# EAGLE board facedancer10 (EAGLE 6.1)
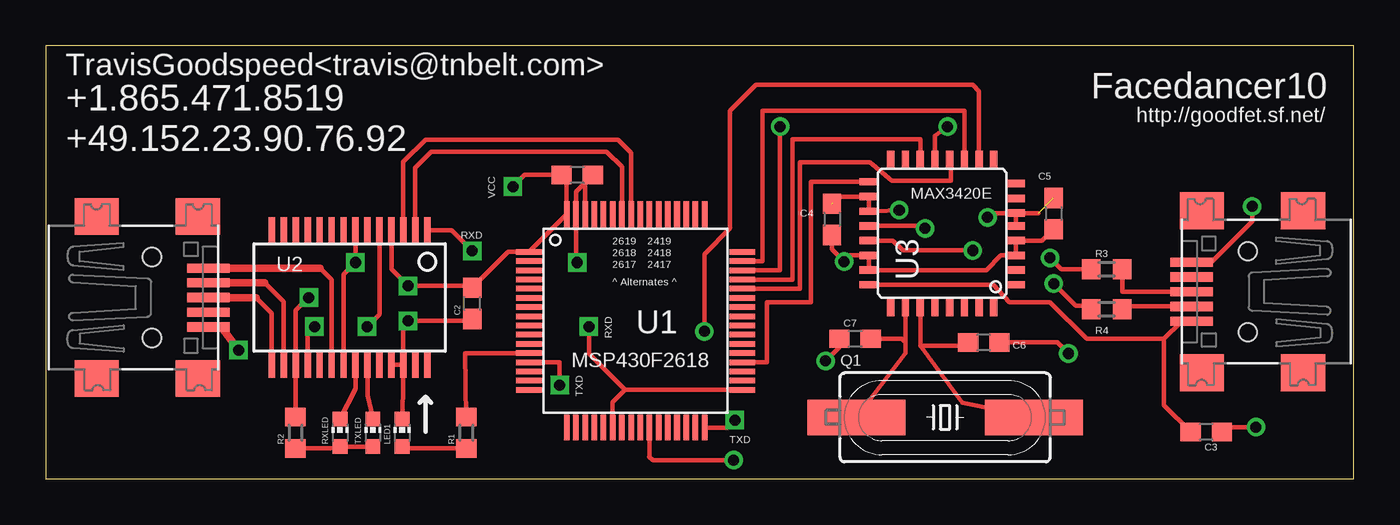
[diagram p0: board, top side]
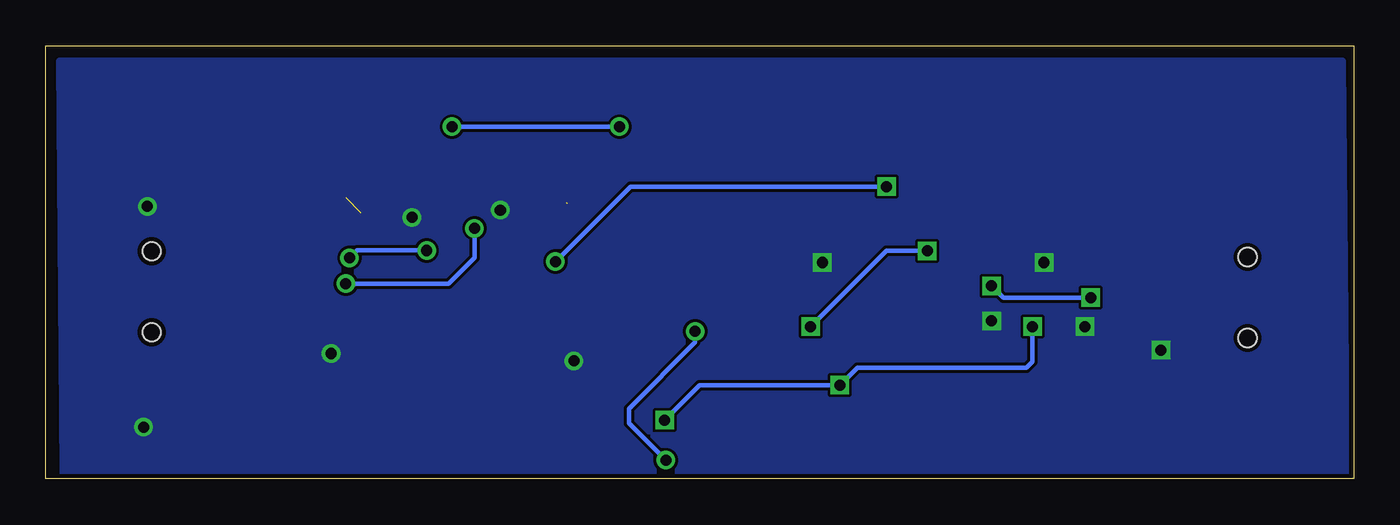
[diagram p1: board, bottom side, seen from below]

Size 71.11 x 23.52 mm. Coordinates in mm from the lower left corner, seen from the top.
Outline: 0,0 71.11,0 71.11,23.52 0,23.52 0,0
Copper layers (1*16): Top 0.035mm / dielectric 1.5mm / Bottom 0.035mm
Design rules: minimum track width 10mil, minimum drill 8mil, track to track 6mil, track to pad 6mil, pad to pad 6mil, via to via 6mil, smd to smd 6mil, copper to edge 10mil, drill to drill 8mil, minimum pad ring 10mil, minimum via ring 8mil, stop-mask expansion 4mil, vias tented up to drill 0mil, thermal gap 10mil

## Footprints (pad centres in the part's own frame; a part is rotated, then mirrored left to right if it is on the bottom)
C0603 = smd 1.1 x 1: 1 -0.85,0; 2 0.85,0
USB-MINIB = smd 0.5 x 2.308: D+ 0,4.064; D- -0.8,4.064; GND 1.6,4.064; ID 0.8,4.064; VBUS -1.6,4.064 | smd 2 x 2.4: GND1 -4.4,-2; GND2 -4.4,3.5; GND3 4.4,3.5; GND4 4.4,-2 | hole 1: -2.2,1; 2.2,1
CHIP-LED0603 = smd 0.8 x 0.8: A 0,-0.75; C 0,0.75
HC49UP = smd 5.334 x 1.93: 1 -4.826,0; 2 4.826,0
R0603 = smd 1 x 1.1: 1 -0.85,0; 2 0.85,0
PM/PAG64 = smd 1.4 x 0.3: 1 -5.8,3.75; 2 -5.8,3.25; 3 -5.8,2.75; 4 -5.8,2.25; 5 -5.8,1.75; 6 -5.8,1.25; 7 -5.8,0.75; 8 -5.8,0.25; 9 -5.8,-0.25; 10 -5.8,-0.75; 11 -5.8,-1.25; 12 -5.8,-1.75; 13 -5.8,-2.25; 14 -5.8,-2.75; 15 -5.8,-3.25; 16 -5.8,-3.75; 33 5.8,-3.75; 34 5.8,-3.25; 35 5.8,-2.75; 36 5.8,-2.25; 37 5.8,-1.75; 38 5.8,-1.25; 39 5.8,-0.75; 40 5.8,-0.25; 41 5.8,0.25; 42 5.8,0.75; 43 5.8,1.25; 44 5.8,1.75; 45 5.8,2.25; 46 5.8,2.75; 47 5.8,3.25; 48 5.8,3.75 | smd 0.3 x 1.4: 17 -3.75,-5.8; 18 -3.25,-5.8; 19 -2.75,-5.8; 20 -2.25,-5.8; 21 -1.75,-5.8; 22 -1.25,-5.8; 23 -0.75,-5.8; 24 -0.25,-5.8; 25 0.25,-5.8; 26 0.75,-5.8; 27 1.25,-5.8; 28 1.75,-5.8; 29 2.25,-5.8; 30 2.75,-5.8; 31 3.25,-5.8; 32 3.75,-5.8; 49 3.75,5.8; 50 3.25,5.8; 51 2.75,5.8; 52 2.25,5.8; 53 1.75,5.8; 54 1.25,5.8; 55 0.75,5.8; 56 0.25,5.8; 57 -0.25,5.8; 58 -0.75,5.8; 59 -1.25,5.8; 60 -1.75,5.8; 61 -2.25,5.8; 62 -2.75,5.8; 63 -3.25,5.8; 64 -3.75,5.8
SSOP28DB = smd 0.348 x 1.397: 1 -4.225,-3.656; 2 -3.575,-3.656; 3 -2.925,-3.656; 4 -2.275,-3.656; 5 -1.625,-3.656; 6 -0.975,-3.656; 7 -0.325,-3.656; 8 0.325,-3.656; 9 0.975,-3.656; 10 1.625,-3.656; 11 2.275,-3.656; 12 2.925,-3.656; 13 3.575,-3.656; 14 4.225,-3.656; 15 4.225,3.656; 16 3.575,3.656; 17 2.925,3.656; 18 2.275,3.656; 19 1.625,3.656; 20 0.975,3.656; 21 0.325,3.656; 22 -0.325,3.656; 23 -0.975,3.656; 24 -1.625,3.656; 25 -2.275,3.656; 26 -2.925,3.656; 27 -3.575,3.656; 28 -4.225,3.656
LQFP32 = smd 0.4 x 1: P1 -2.8,-4; P2 -2,-4; P3 -1.2,-4; P4 -0.4,-4; P5 0.4,-4; P6 1.1,-4; P7 1.9,-4; P8 2.7,-4; P17 2.8,4; P18 2,4; P19 1.2,4; P20 0.4,4; P21 -0.4,4; P22 -1.2,4; P23 -2,4; P24 -2.8,4 | smd 1 x 0.4: P9 4,-2.8; P10 4,-2; P11 4,-1.2; P12 4,-0.4; P13 4,0.4; P14 4,1.2; P15 4,2; P16 4,2.8; P25 -4,2.8; P26 -4,2; P27 -4,1.2; P28 -4,0.4; P29 -4,-0.4; P30 -4,-1.2; P31 -4,-2; P32 -4,-2.8

## Placement (x,y rotation side)
C1  0.1µF  [C0603]  28.89,16.51 180 top
C2  0.1µF  [C0603]  23.18,9.53 90 top
C3  1.0uF  [C0603]  63.1,2.54 180 top
C4  1.0uF  [C0603]  42.74,14.1 270 top
C5  0.1µF  [C0603]  54.79,14.4 270 top
C6  18pF  [C0603]  51,7.4 180 top
C7  18pF  [C0603]  44,7.6 0 top
CN1  HOST  [USB-MINIB]  4.76,9.84 270 top
CN2  VICTIM  [USB-MINIB]  66.36,10.16 90 top
LED1  [CHIP-LED0603]  19.37,2.49 0 top
Q1  12MHz  [HC49UP]  48.9,3.33 0 top
R1  330  [R0603]  22.86,2.49 90 top
R2  330  [R0603]  13.57,2.49 90 top
R3  33  [R0603]  57.68,11.38 0 top
R4  33  [R0603]  57.68,9.21 0 top
RXLED  [CHIP-LED0603]  15.99,2.49 0 top
TXLED  [CHIP-LED0603]  17.78,2.49 0 top
U1  F261X---PM64  [PM/PAG64]  32.07,8.57 0 top
U2  FT232RL-BASICSSOP  [SSOP28DB]  16.51,9.84 180 top
U3  MAX3420ELQFP32  [LQFP32]  48.74,13.34 90 top

## Library data of the parts
C1-C7 R1-R4 = rcl
CN1 CN2 = adafruit
LED1 RXLED TXLED = led
Q1 = crystal; OC_FARNELL: unknown; OC_NEWARK: unknown
U1 = TI_MSP430_v13
U2 = SparkFun
U3 = active

## Nets
5VCC: CN1.VBUS U2.20
!CS: U1.44 U3.P12
!RST: U1.26 U3.P10
DTR: U1.58 U2.2
GND: C1.1 C2.1 C3.1 C4.1 C5.1 C6.1 C7.1 CN1.GND CN2.GND LED1.C U1.62 U1.63 U2.7 U2.18 U2.21 U2.25 U2.26 U3.P5 U3.P6 U3.P18 U3.P19
INT: U1.36 U3.P17
MISO: U1.46 U3.P13
MOSI: U1.45 U3.P14
N$1: R1.2 U1.12
N$2: LED1.A R1.1
N$3: C7.2 Q1.1 U3.P26
N$4: C6.2 Q1.2 U3.P27
N$5: R3.1 U3.P21
N$6: RXLED.C U2.22
N$7: TXLED.C U2.23
N$8: R2.1 RXLED.A TXLED.A
N$9: R4.1 U3.P20
N$10: CN2.D- R4.2
N$11: CN2.D+ R3.2
RTS: U1.57 U2.3
RXD: U1.22 U1.33 U2.1
SCLK: U1.47 U3.P11
TXD: U1.13 U1.32 U2.5
USBDM: CN1.D- U2.16
USBDP: CN1.D+ U2.15
VBCOMP: C3.2 CN2.VBUS U3.P24
VCC: C1.2 C2.2 C4.2 C5.2 R2.2 U1.1 U1.64 U2.4 U2.17 U3.P3 U3.P4 U3.P22 U3.P23

## Tracks (layer width: path | path; a pad name or v marks a point on that pad's centre or on a via)
5VCC
  Top 0.254: U2.20 15.54,10.82 14.91,11.44
  Top 0.406: CN1.VBUS 14.91,11.44
!CS
  Top 0.254: U3.P12 49.2,17.08 49.2,16.2 46,16.2 44.8,17.2 41,17.2 41,10.32 U1.44
!RST  (via drill 0.6)
  Top 0.254: U3.P10 50.74,21.06 50.4,21.4 38.6,21.4 37.2,20 37.2,13.6 35.8,12.2 v35.8,8 | v37.4,1 33,1 32.8,1.2 32.82,1.22 U1.26
  Bottom 0.254: v35.8,8 35.8,7.4 39.4,3.8 39.4,3 v37.4,1
DTR
  Top 0.254: U2.2 20.09,16.91 20.95,17.78 30.48,17.78 31.32,16.94 U1.58
GND  (via drill 0.6)  (2 unrouted)
  Top 0.254: U2.26 U2.25 | U2.26 19.43,8.32 v19.68,8.57 23.28,8.57 C2.1 | U2.18 14.23,8.2 v14.61,8.26 | U2.7 16.84,13.34 16.83,13.34 v16.83,11.75 16.18,11.11 U2.21 | U2.26 19.43,4.63 LED1.C | U1.62 29.32,16.09 C1.1 28.82,15.59 U1.63 28.82,11.82 v28.89,11.75 | U3.P5 U3.P6 | U3.P6 51.44,14.44 v51.2,14.2 | v46.4,14.6 45.13,14.54 U3.P19 U3.P18 42.8,15.34 42.8,15 | CN2.GND 62.33,11.8 63.4,11.8 65.6,14 v65.6,14.8 | C3.1 64.21,2.8 v65.8,2.8 | U3.P6 53.97,14.44 | C7.1 43.15,7.15 v42.4,6.4 | C6.1 55,7.4 v55.6,6.8
  Top 0.406: CN1.GND 9.54,8.24 v10.48,6.99
  pour Bottom: 0.41,0.32 70.17,0.32 70.37,22.68 0.61,22.68
INT
  Top 0.254: U3.P17 41.6,16.14 41.6,9.6 39.2,9.6 39.2,6.32 U1.36
MISO  (via drill 0.6)
  Top 0.254: U1.46 39.92,11.32 v39.92,19.13 | U3.P13 48.34,18.65 v49.02,19.13
  Bottom 0.254: v39.92,19.13 v49.02,19.13
MOSI
  Top 0.254: U1.45 40.59,10.82 40.59,18.45 47.54,18.45 U3.P14
N$1
  Top 0.254: U1.12 22.79,6.82 R1.2
N$2
  Top 0.254: R1.1 19.57,1.64 LED1.A
N$3
  Top 0.254: U3.P26 46.74,7.4 | 46.74,7.4 46.74,6.8 Q1.1 | C7.2 46.54,7.6 46.74,7.4
N$4
  Top 0.254: U3.P27 47.54,7.23 | 47.54,7.23 49.85,4.13 Q1.2 | 47.54,7.23 49.98,7.23 C6.2
N$5  (via drill 0.6)
  Top 0.254: U3.P21 46.06,12.94 46.6,12.4 v50.4,12.4 | R3.1 55.22,11.38 v54.6,12
  Bottom 0.254: v50.4,12.4 54.2,12.4 v54.6,12
N$6
  Top 0.254: U2.22 16.84,4.88 RXLED.C
N$7
  Top 0.254: U2.23 17.48,4.54 TXLED.C
N$8
  Top 0.254: R2.1 15.49,1.64 RXLED.A TXLED.A
N$9  (via drill 0.6)
  Top 0.254: U3.P20 47.66,13.73 v47.8,13.6 | R4.1 56.83,9.37 56.8,9.4 56,9.4 v54.8,10.6
  Bottom 0.254: v47.8,13.6 47.8,12 49.2,10.6 v54.8,10.6
N$10
  Top 0.254: CN2.D- 58.53,9.36 R4.2
N$11
  Top 0.254: CN2.D+ 58.53,10.16 R3.2
RTS
  Top 0.254: U2.3 19.43,17.21 20.64,18.41 31.11,18.41 31.82,17.71 U1.57
RXD  (via drill 0.6)
  Top 0.254: 31.49,4.82 U1.33 | U1.22 30.82,4.15 31.49,4.82 | U2.1 22.06,13.5 v23.18,12.38 | v29.53,8.26 29.53,6.79 31.49,4.82
  Bottom 0.254: v23.18,12.38 25.4,12.38 v29.53,8.26
SCLK
  Top 0.254: U1.47 38.97,11.82 38.97,20 49.94,20 U3.P11
TXD  (via drill 0.6)
  Top 0.254: U2.5 18.14,8.93 v17.46,8.26 | U1.32 37.06,2.77 v37.47,3.17 | U1.13 27.94,6.32 v27.94,5.08
  Bottom 0.254: v17.46,8.26 17.46,6.35 17.78,6.03 26.99,6.03 v27.94,5.08 35.56,5.08 v37.47,3.17
USBDM
  Top 0.254: U2.16 12.94,9.61 11.9,10.64
  Top 0.406: CN1.D- 11.9,10.64
USBDP
  Top 0.254: U2.15 12.29,8.99 11.43,9.84
  Top 0.406: CN1.D+ 11.43,9.84
VBCOMP
  Top 0.254: C3.2 60.8,3.98 60.8,7.6 | 60.8,7.6 61.76,8.56 CN2.VBUS | 60.8,7.6 56.6,7.6 54.6,9.6 52.4,9.6 51.53,10.54 U3.P24
VCC  (via drill 0.6)
  Top 0.254: U2.4 18.79,11.38 v19.68,10.48 23.07,10.48 C2.2 25.12,12.32 U1.1 U1.64 28.32,16.23 C1.2 26.04,16.51 v25.4,15.88 | v14.29,9.84 13.59,9.14 U2.17 13.59,4.73 R2.2 | C4.2 42.74,12.46 v43.4,11.8 43.73,12.13 U3.P22 U3.P23 51.13,11.34 51.94,12.13 U3.P3 U3.P4 54.17,12.94 C5.2
  Bottom 0.254: v14.29,9.84 19.05,9.84 v19.68,10.48 | v25.4,15.88 39.33,15.88 v43.4,11.8

## Text on the board
tNames: TravisGoodspeed<travis@tnbelt.com> | Facedancer10 | +1.865.471.8519 | http://goodfet.sf.net/ | +49.152.23.90.76.92 | VCC | MAX3420E | RXD | 2619 | 2419 | 2618 | 2418 | 2617 | 2417 | ^ Alternates ^ | RXD | MSP430F2618 | TXD | TXD